# Altium PCB PCB1.PcbDoc
Units mil, origin at the board's own origin, x right, y up, seen from the top; angles counter-clockwise.
Board outline 6000 x 4000 mil, 2 copper layers (Top Layer, Bottom Layer); 9 components, 10 nets, 46 pads, 0 vias.
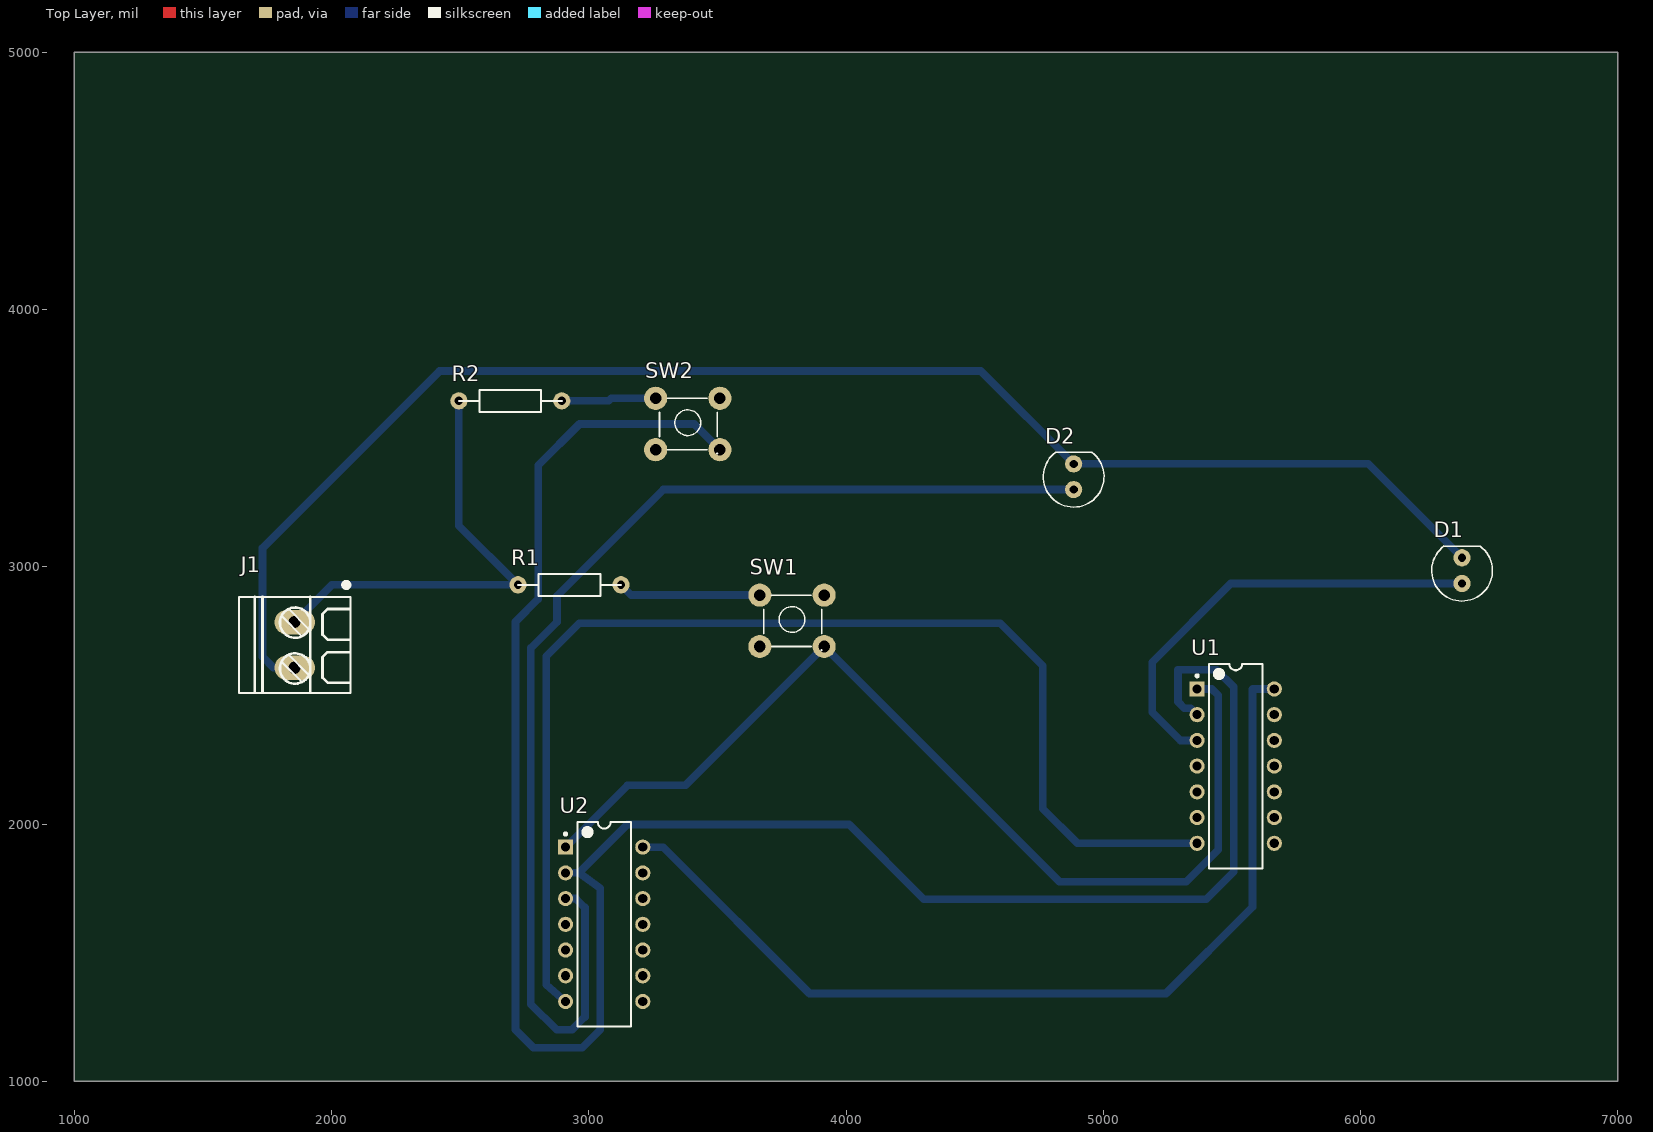
[diagram p0: Top Layer view]
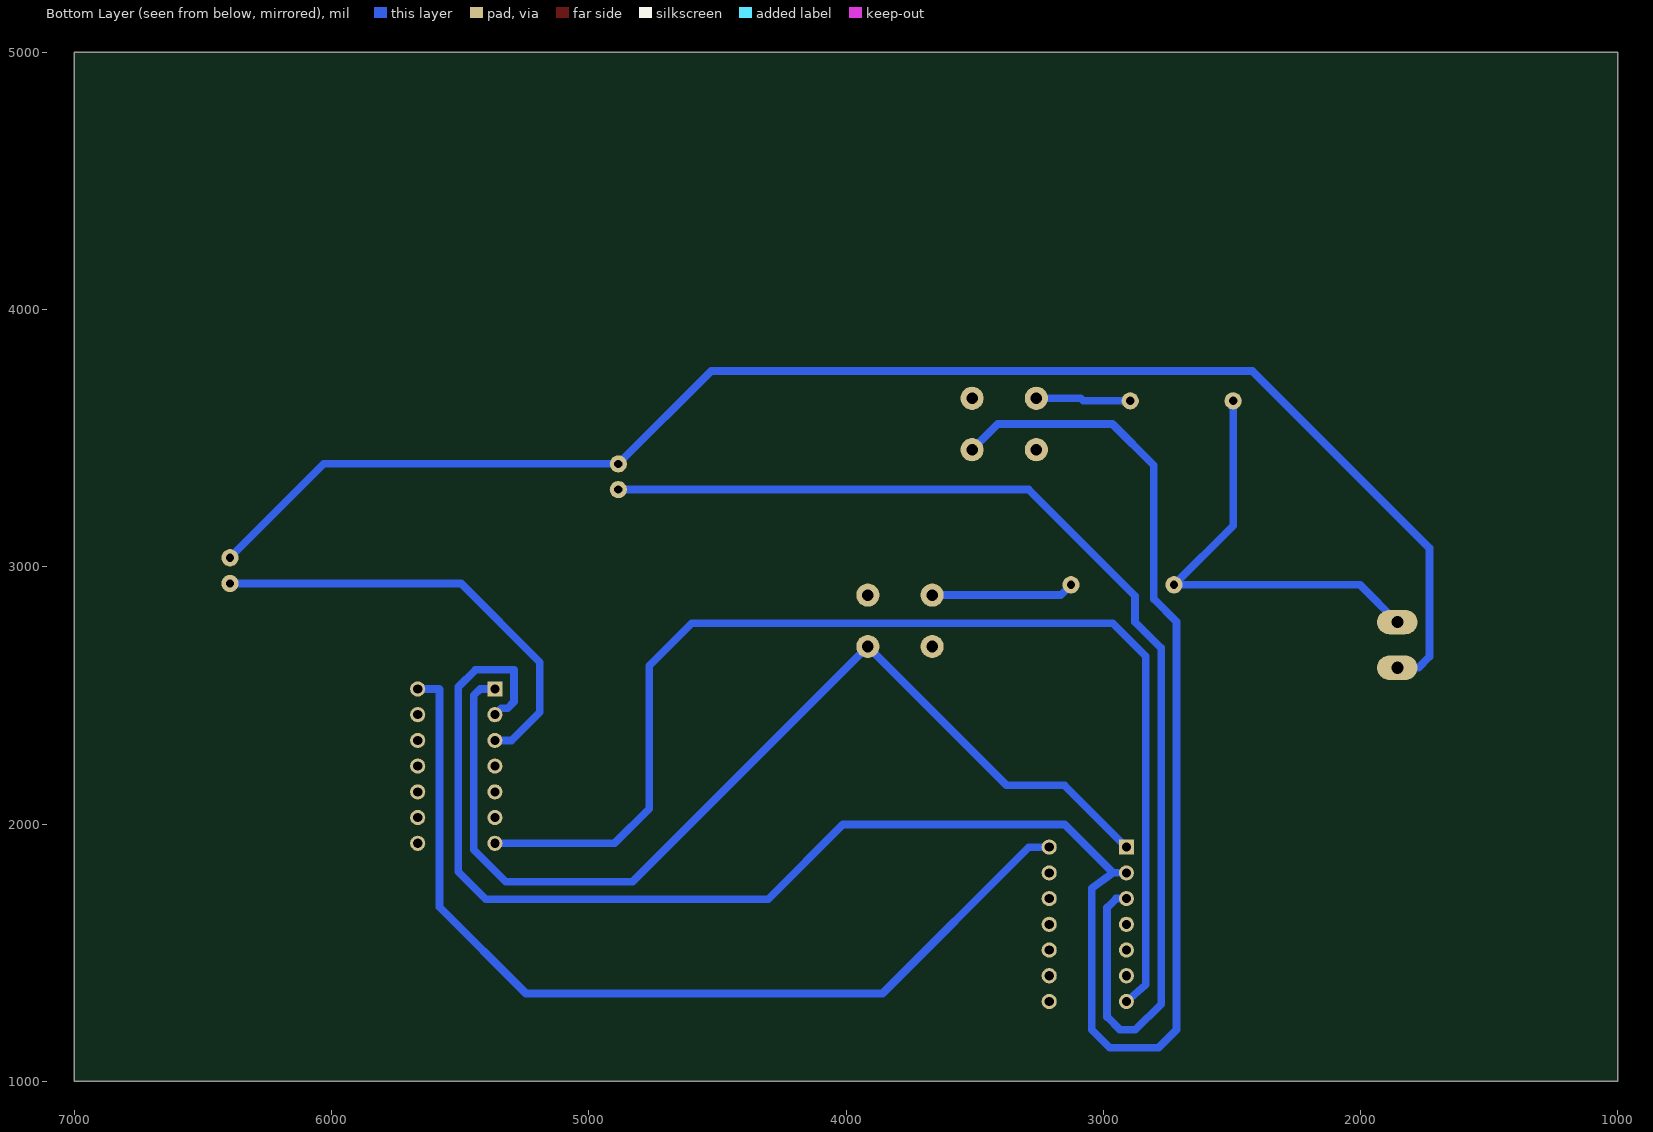
[diagram p1: Bottom Layer view, seen from below]
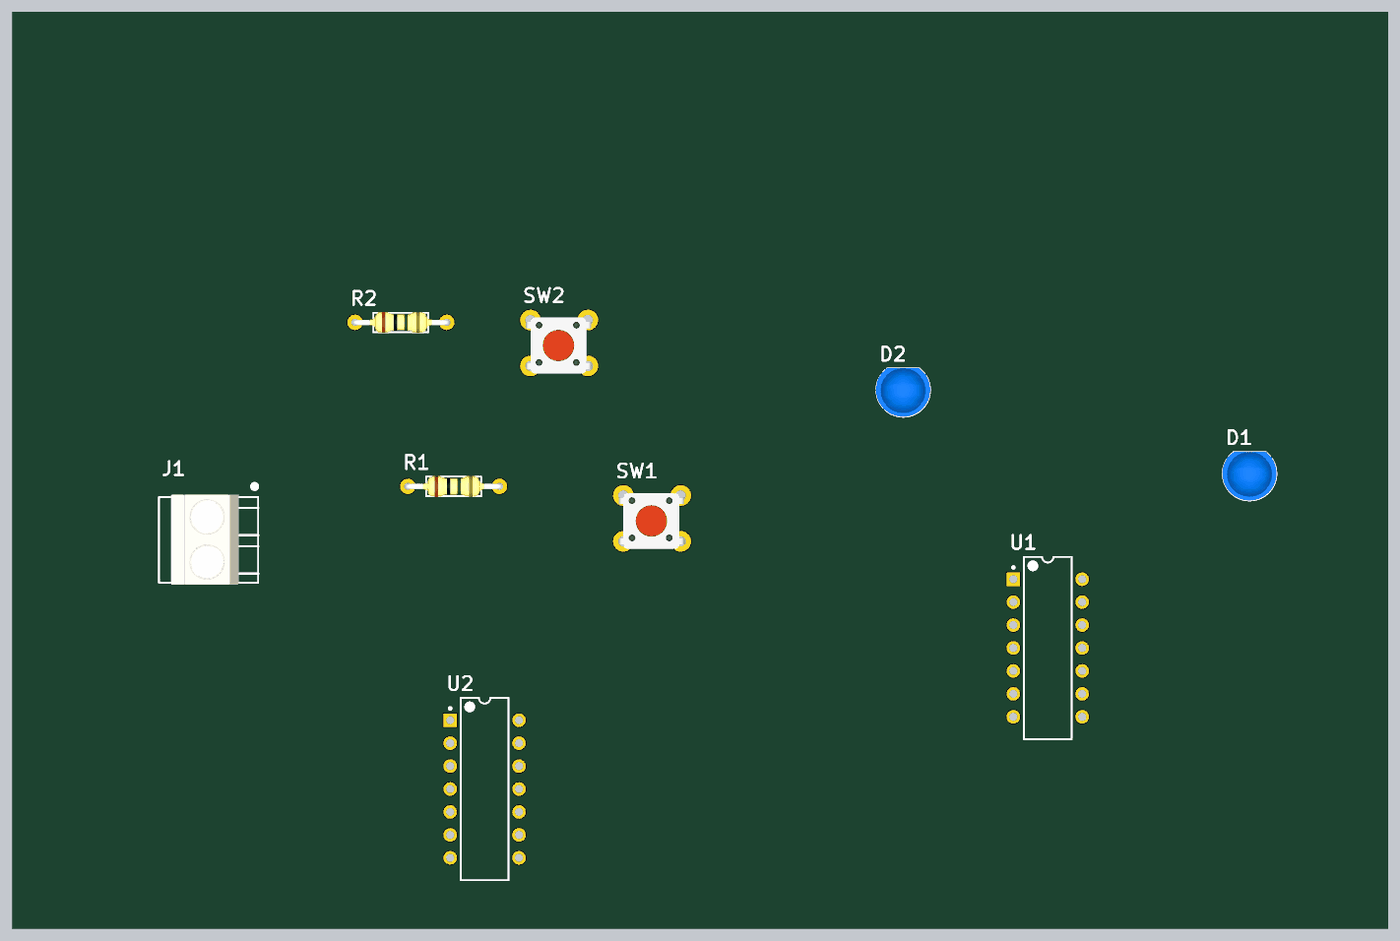
[diagram p2: 3D render of the assembled board from above, using the file's embedded part models]

## Layer stack, top to bottom
Top Solder: solder mask 0.4, Solder Resist, Dk 3.5
Top Layer: signal copper 1.4
Dielectric 1: dielectric 12.6, FR-4, Dk 4.8
Bottom Layer: signal copper 1.4
Bottom Solder: solder mask 0.4, Solder Resist, Dk 3.5

## Board outline
1000,1000 7000,1000 7000,5000 1000,5000

## Design rules (kind name [scope] priority, off if disabled: settings)
Clearance [All] p1: gap=30
PolygonConnect [All] p1: connectstyle=Relief reliefconductorwidth=10 reliefentries=4 polygonreliefangle="90 Angle" airgapwidth=10
RoutingLayers [All] p1: top layer_v5=FALSE bottom layer_v5=TRUE
RoutingVias [All] p1: holewidth=28 width=80 viastyle="Through Hole" minholewidth=28 minwidth=80 maxholewidth=28 maxwidth=80
SolderMaskExpansion [All] p1: expansion=4
Width [All] p1: maxlimit=30 minlimit=20 preferedwidth=30
29 further rules are at their usual default settings.

## Components (designator, comment, footprint, x,y, rotation, side; value= is the part's Value field where it differs from the comment)
D1 "LED" "LED-0 5mm BLUE" 6395,2985 r180 top
D2 "LED" "LED-0 5mm BLUE" 4885,3350 r180 top
J1 "CON.Domino2" "Domino 2M" 1640,2510 r0 top
R1 "RESISTOR" "Res 10mm (1/2W)" 2925,2930 r0 top
R2 "RESISTOR" "Res 10mm (1/2W)" 2695,3645 r0 top
SW1 "SW" SW4 3665,2890 r0 top
SW2 "SW" SW4 3260,3655 r0 top
U1 "7486" DIP-14 5515,2225 r0 top
U2 "7408" DIP-14 3060,1610 r0 top

## Footprints (in the part's own frame and the unit in brackets; to place one, negate y for a bottom-side part, rotate by r counter-clockwise, add the part's x,y. Pads: shape width x height; smd on the part's side, far side on the other; paste and mask are expansions set on the pad)
DIP-14 [mm] "DIP; 14 Leads; Row Spacing 7.62 mm; Pitch 2.54 mm"
  rect 1.5x1.5 hole 0.9: 1(-3.81,7.62)
  round 1.5 hole 0.9: 2(-3.81,5.08) 3(-3.81,2.54) 4(-3.81,0) 5(-3.81,-2.54) 6(-3.81,-5.08) 7(-3.81,-7.62) 8(3.81,-7.62) 9(3.81,-5.08) 10(3.81,-2.54) 11(3.81,0) 12(3.81,2.54) 13(3.81,5.08) 14(3.81,7.62)
  silkscreen extent -3.93,-10.1 2.65,10.1, body extent -3.6,-10.1 3.6,10.1, height 5.08
"Domino 2M" [mm]
  oval 4x2.4 hole 1.2: 1(5.5,6.975) 2(5.5,2.475)
  silkscreen extent 0,0 11,10.9, body extent 1.35,-0.22 8.85,9.78, height 10
"LED-0 5mm BLUE" [mil] "Typical LED; BLUE; 2 Leads; Solder Pad 35mil"
  round 67 hole 32: 1(0,50) 2(0,-50)
  silkscreen extent -118,-96 118,118, body extent -118,-96 119,117, height 345
"Res 10mm (1/2W)" [mil] "Resistor; 2 Leads; 1/2W; Solder Pad 35mil"
  round 67 hole 32: 1(-200,0) 2(200,0)
  silkscreen extent -200,-43 200,42, body extent -212,-46 212,45, height 96
SW4 [mil] "SW button 4pin, 250 x250 mil"
  round 90 hole 45: 1(0,0) 2(250,-200) 3(250,0) 4(0,-200)
  silkscreen extent 15,-215 240,0, body extent -34,-233 278,11, height 276

## Part data
D1 D2: "Typical LED"
J1: "2 pins Domino Header"
R1 R2: "Resistor"
SW1 SW2: library part SW4, "Switch button 4 pin"
U1: "2-Input Exclusive-OR Gate"
U2: "Quad 2-Input AND Gate"

## Nets (pads, with @x,y where several pads share a name; then routed paths per layer and width w, separated by ;. In a path a pad name is that pad's centre, name@x,y a point inside that pad or via, vN(x,y) a via of type N, cw(c..) or ccw(c..) an arc to the next point about the centre after c; other vN are vias at no path point)
GND: U1.7 U2.7 | length 4638.5
  Bottom Layer w30: U2.7 2835,1375 2835,2652 2963,2780 4600,2780 4765,2615 4765,2060 4900,1925 U1.7
NetD1_1: D1.1 U1.3 | length 1746.5
  Bottom Layer w30: U1.3 5300,2325 5190,2435 5190,2629.32 5495.68,2935 D1.1
NetD1_2: D1.2 D2.2 J1.2 | length 5813.9
  Bottom Layer w30: J1.2 1774.56,2607.44 1732,2650 1732,3073 2420,3761 4524,3761 D2.2 6030,3400 D1.2
NetD2_1: D2.1 U2.3 | length 4594.9
  Bottom Layer w30: U2.3 2950,1710 2985,1675 2985,1250 2935,1200 2875,1200 2775,1300 2775,2683.85 2876.15,2785 2876.15,2886.15 3290,3300 D2.1
NetJ1_1: J1.1 R1.1 R2.1 | length 1739
  Bottom Layer w30: J1.1 2001.93,2930 R1.1 2495,3160 R2.1
NetR1_2: R1.2 SW1.1 | length 556.6
  Bottom Layer w30: R1.2 3165,2890 SW1.1
NetR2_2: R2.2 SW2.1 | length 369.1
  Bottom Layer w30: R2.2 3078,3645 3088,3655 SW2.1
NetSW1_2: SW1.2 U1.1 U2.1 | length 3983.2
  Bottom Layer w30: U2.1 3151,2151 3376,2151 SW1.2 4830,1775 5322,1775 5447,1900 5447,2500 5422,2525 U1.1
NetSW2_2: SW2.2 U1.2 U2.2 | length 8106.9
  Bottom Layer w30: U2.2 2962,1810 ; SW2.2 3410,3555 2964,3555 2804,3395 2804,2875 2715,2786 2715,1200 2785,1130 2975,1130 3045,1200 3045,1750 2962,1810 ; U1.2 5340,2450 5315.47,2450 5290.47,2475 5290.47,2599.53 5440,2599.53 5507,2532.53 5507,1815 5400,1708 4302,1708 4012,1998 3150,1998 2962,1810
VCC: U1.14 U2.14 | length 3677.3
  Bottom Layer w30: U2.14 3289,1910 3858,1341 5244,1341 5580,1677 5580,2524 5581,2525 U1.14
pads on no net: SW1.3 SW1.4 SW2.3 SW2.4 U1.4 U1.5 U1.6 U1.8 U1.9 U1.10 U1.11 U1.12 U1.13 U2.4 U2.5 U2.6 U2.8 U2.9 U2.10 U2.11 U2.12 U2.13